# EAGLE board nixie (EAGLE 9.1.3)
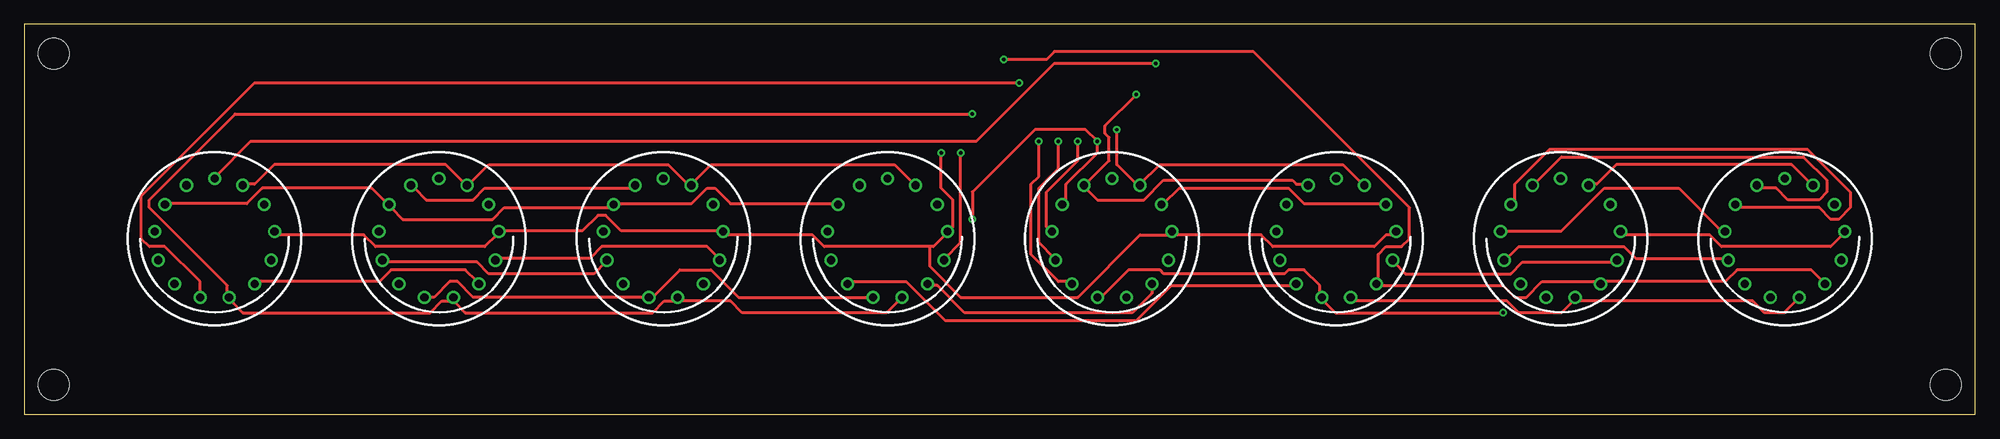
[diagram p0: board, top side]
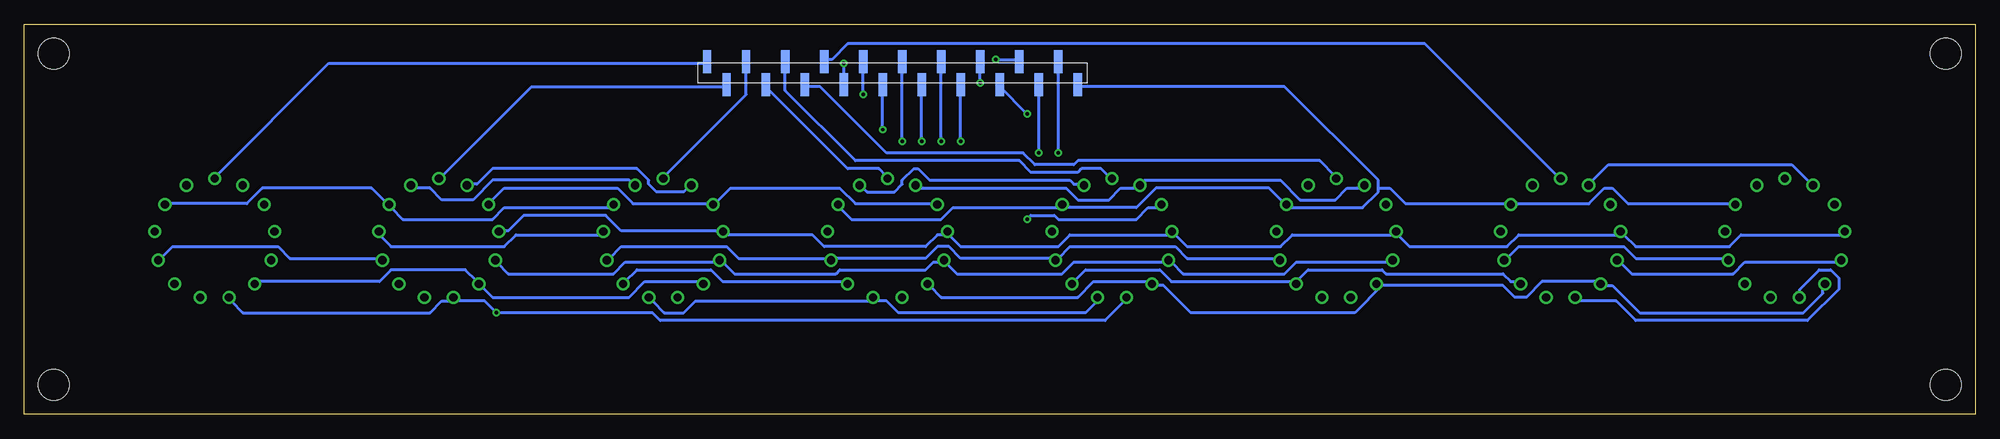
[diagram p1: board, bottom side, seen from below]

Size 200 x 40 mm. Coordinates in mm from the lower left corner, seen from the top.
Outline: 0,0 200,0 200,40 0,40 0,0
Copper layers (1*16): Top 0.035mm / dielectric 1.5mm / Bottom 0.035mm
Design rules "default": minimum track width 6mil, minimum drill 0.35mm, track to track 6mil, track to pad 6mil, pad to pad 6mil, via to via 6mil, smd to smd 6mil, copper to edge 40mil, drill to drill 6mil, minimum pad ring 10mil, minimum via ring 8mil, stop-mask expansion 4mil, vias tented up to drill 0mil, thermal gap 10mil
Net classes: 0 default: width 0.3 mm, clearance 0.5 mm
Holes 3.2 mm at 3,37 3,3 197,3 197,37

## Footprints (pad centres in the part's own frame; a part is rotated, then mirrored left to right if it is on the bottom)
PSM-210223 = smd 0.85 x 2.35: 1 0,1.175; 2 2,-1.175; 3 4,1.175; 4 6,-1.175; 5 8,1.175; 6 10,-1.175; 7 12,1.175; 8 14,-1.175; 9 16,1.175; 10 18,-1.175; 11 20,1.175; 12 22,-1.175; 13 24,1.175; 14 26,-1.175; 15 28,1.175; 16 30,-1.175; 17 32,1.175; 18 34,-1.175; 19 36,1.175; 20 38,-1.175
IN-14 = drill 0.84: 0 5.094,-3.516; 1 -5.094,-3.516; 2 -6.145,-0.746; 3 -5.788,2.195; 4 -4.105,4.633; 5 -1.481,6.01; 6 1.481,6.01; 7 4.105,4.633; 8 5.788,2.195; 9 6.145,-0.746; A 0,-6.19; LHDP 2.877,-5.481; RHDP -2.877,-5.481

## Placement (x,y rotation side)
J4  PSM-210223  [PSM-210223]  92,35 180 bottom
N1  IN-14  [IN-14]  19.5,18 180 top
N2  IN-14  [IN-14]  42.5,18 180 top
N3  IN-14  [IN-14]  65.5,18 180 top
N4  IN-14  [IN-14]  88.5,18 180 top
N5  IN-14  [IN-14]  111.5,18 180 top
N6  IN-14  [IN-14]  134.5,18 180 top
N7  IN-14  [IN-14]  157.5,18 180 top
N8  IN-14  [IN-14]  180.5,18 180 top

## Library data of the parts
J4 N1-N8 = taki-library

## Nets
N$88: J4.1 N1.1 N2.1 N3.1 N4.1 N5.1 N6.1 N7.1 N8.1
N$89: J4.3 N1.3 N2.3 N3.3 N4.3 N5.3 N6.3 N7.3 N8.3
N$91: J4.4 N1.4 N2.4 N3.4 N4.4 N5.4 N6.4 N7.4 N8.4
N$92: J4.5 N1.5 N2.5 N3.5 N4.5 N5.5 N6.5 N7.5 N8.5
N$93: J4.7 N1.7 N2.7 N3.7 N4.7 N5.7 N6.7 N7.7 N8.7
N$95: J4.8 N1.8 N2.8 N3.8 N4.8 N5.8 N6.8 N7.8 N8.8
N$96: J4.9 N1.9 N2.9 N3.9 N4.9 N5.9 N6.9 N7.9 N8.9
N$97: J4.12 N1.LHDP N2.LHDP N3.LHDP N4.LHDP N5.LHDP N6.LHDP N7.LHDP N8.LHDP
N$98: J4.11 N1.RHDP N2.RHDP N3.RHDP N4.RHDP N5.RHDP N6.RHDP N7.RHDP N8.RHDP
N$99: J4.2 N1.2 N2.2 N3.2 N4.2 N5.2 N6.2 N7.2 N8.2
N$100: J4.6 N1.6 N2.6 N3.6 N4.6 N5.6 N6.6 N7.6 N8.6
N$101: J4.10 N1.0 N2.0 N3.0 N4.0 N5.0 N6.0 N7.0 N8.0
N$102: J4.13 N1.A
N$103: J4.14 N2.A
N$104: J4.15 N3.A
N$105: J4.16 N4.A
N$106: J4.17 N5.A
N$107: J4.18 N6.A
N$108: J4.19 N7.A
N$109: J4.20 N8.A

## Tracks (layer width: path | path; a pad name or v marks a point on that pad's centre or on a via)
N$88
  Top 0.3: N6.1 139.2,21.6 131.2,21.6 129.6,23.2 118.4,23.2 116.8,21.6 N5.1
  Bottom 0.3: N6.1 139.6,21.2 150.8,21.2 152,20 161.2,20 162.4,21.2 N7.1 162.8,21.6 164.4,23.2 175.6,23.2 177.2,21.6 185.2,21.6 N8.1 | N5.1 116.4,21.2 115.2,20 106,20 104.8,21.2 93.6,21.2 N4.1 93.2,21.2 86,21.2 84,23.2 72.4,23.2 70.8,21.6 N3.1 70.4,21.2 62.8,21.2 61.2,22.8 61.2,23.2 | N1.1 24.8,21.6 35.6,21.6 37.2,23.2 38,23.2 39.6,21.6 47.2,21.6 N2.1 47.6,21.6 58.4,21.6 60,23.2 61.2,23.2 | 61.2,23.2 61.2,24 70.8,33.6 92,33.6 J4.1
N$89  (via drill 0.35)
  Top 0.3: v96,26.8 96,17.6 94.4,16 N4.3 | N2.3 48.4,16 58,16 59.2,17.2 70,17.2 71.2,16 N3.3 | N7.3 163.2,15.6 153.6,15.6 152.4,14.4 141.6,14.4 140.4,15.6 N6.3
  Bottom 0.3: N7.3 163.6,16 172.8,16 174,17.2 184.8,17.2 186,16 N8.3 | N6.3 140,16 138.8,17.2 128,17.2 126.8,16 117.6,16 N5.3 117.2,16 107.6,16 106.4,17.2 105.2,17.2 104,16 94.4,16 N4.3 94,16 92.8,17.2 82,17.2 80.8,16 71.6,16 N3.3 | N1.3 25.6,16 34.8,16 36,17.2 46.8,17.2 48,16 N2.3 | v96,26.8 96,33.6 J4.3
N$91  (via drill 0.35)
  Top 0.3: N1.4 24,13.6 36.4,13.6 37.6,14.8 45.2,14.8 46.4,13.6 N2.4 | N8.4 184.4,13.6 183.2,14.8 175.6,14.8 174.4,13.6 162,13.6 N7.4 161.6,13.6 155.6,13.6 154,12 152.8,12 151.6,13.2 138.8,13.2 N6.4 138.8,13.6 138.8,16.4 139.6,17.2 141.2,17.2 142,18 142,21.2 126,37.2 105.6,37.2 104.8,36.4 v100.4,36.4 | N4.4 92.8,13.2 93.6,13.2 96.4,10.4 113.6,10.4 115.6,12.4 115.6,13.2 N5.4
  Bottom 0.3: N4.4 92.4,13.6 91.2,14.8 83.6,14.8 82.4,13.6 70,13.6 N3.4 69.6,13.6 68.4,14.8 60.8,14.8 60.4,14.4 48.4,14.4 47.6,13.6 46.8,13.6 N2.4 | v100.4,36.4 98,36.4 J4.4 | N5.4 116,13.6 128.4,13.6 129.6,14.8 137.2,14.8 138.4,13.6 N6.4
N$92  (via drill 0.35)
  Top 0.3: N8.5 181.6,11.6 180.4,10.4 178.4,10.4 177.2,11.6 159.2,11.6 N7.5 158.8,11.6 157.6,10.4 153.2,10.4 152,11.6 136,11.6 N6.5 | N4.5 89.6,11.6 88.4,10.4 73.6,10.4 72.4,11.6 67.2,11.6 N3.5 66.8,11.6 65.6,11.6 64.4,10.4 45.2,10.4 44,11.6 N2.5 43.6,11.6 42.8,11.6 41.6,10.4 22.4,10.4 21.2,11.6 N1.5 20.8,12 20.8,13.2 12.8,21.2 12.8,22 21.6,30.8 v97.2,30.8
  Bottom 0.3: N6.5 135.6,11.6 134.4,10.4 132.4,10.4 131.2,11.6 113.2,11.6 N5.5 112.8,11.6 111.6,11.6 110.4,10.4 91.2,10.4 90,11.6 N4.5 | v97.2,30.8 100,33.6 J4.5
N$93  (via drill 0.35)
  Top 0.3: v104,28 104,24.4 103.2,23.6 103.2,16.4 106,13.6 107.2,13.6 N5.7 | N6.7 130,13.2 117.6,13.2 114,9.6 94.4,9.6 90.4,13.6 84.4,13.6 N4.7
  Bottom 0.3: N6.7 130.4,13.6 136.4,13.6 138,12 152,12 153.2,13.2 N7.7 153.6,13.6 154.8,14.8 162.4,14.8 163.6,13.6 176,13.6 N8.7 | v104,28 104,33.6 J4.7 | N5.7 107.2,13.2 106,12 92,12 90.4,13.6 84.4,13.6 N4.7 84,13.2 83.2,13.2 80.4,10.4 63.6,10.4 60.8,13.2 | N1.7 15.6,13.2 15.6,12.4 17.6,10.4 34.4,10.4 37.2,13.2 38,13.2 N2.7 38.4,13.6 44.4,13.6 46,12 47.2,12 48.4,13.2 60.8,13.2 | 60.8,13.2 61.2,13.2 N3.7 60.8,13.2
N$95  (via drill 0.35)
  Top 0.3: N2.8 36.8,15.6 46.4,15.6 47.6,14.4 58.4,14.4 59.6,15.6 N3.8 | v106,28 106,25.2 104,23.2 104,17.6 105.6,16 N5.8 | N8.8 174.4,16 165.2,16 164,17.2 153.2,17.2 152,16 N7.8
  Bottom 0.3: N1.8 14,15.6 23.6,15.6 24.8,14.4 35.2,14.4 36.4,15.6 N2.8 | N3.8 60,15.6 69.6,15.6 70.8,14.4 81.2,14.4 82.4,15.6 N4.8 82.8,15.6 92.4,15.6 93.6,14.4 104.4,14.4 105.6,15.6 N5.8 106,15.6 106.8,15.6 107.6,14.8 116.4,14.8 116.8,14.4 127.2,14.4 128.4,15.6 N6.8 128.8,15.6 138.4,15.6 139.6,14.4 150.4,14.4 151.6,15.6 N7.8 | v106,28 106,36 J4.8
N$96  (via drill 0.35)
  Top 0.3: v108,28 108,26 104.8,22.8 104.8,19.2 105.2,18.8 N5.9 | N8.9 174,18.8 169.6,23.2 162,23.2 157.6,18.8 151.6,18.8 N7.9
  Bottom 0.3: N1.9 13.6,18.4 24,18.4 25.2,17.2 34.8,17.2 36,18.4 N2.9 36.4,18.4 46.8,18.4 48,17.2 58,17.2 59.2,18.4 N3.9 59.6,18.4 70,18.4 71.2,17.2 80.8,17.2 82,18.4 N4.9 82.4,18.4 92.8,18.4 94,17.2 104,17.2 105.2,18.4 N5.9 105.6,18.4 106.4,18.4 107.6,17.2 118,17.2 119.2,18.4 128,18.4 N6.9 128.4,18.8 138.8,18.8 140.4,20.4 148.8,20.4 150.4,18.8 151.2,18.8 N7.9 | v108,28 108,33.6 J4.9
N$97  (via drill 0.35)
  Top 0.3: N3.LHDP 62.4,23.2 47.2,23.2 46,22 41.2,22 40,23.2 N2.LHDP | v114,32.8 110.8,29.6 110.8,28.8 111.2,28.4 111.2,26 108.8,23.6 N5.LHDP 108.8,23.2 110,22 114.8,22 116.8,24 130,24 130.4,23.6 131.6,23.6 N6.LHDP | N8.LHDP 178,23.2 179.6,23.2 180.8,22 184,22 184.8,22.8 184.8,24 182.4,26.4 157.6,26.4 154.8,23.6 N7.LHDP
  Bottom 0.3: N1.LHDP 16.8,23.6 18.8,25.6 37.6,25.6 39.6,23.6 N2.LHDP | v114,32.8 114,36 J4.12 | N5.LHDP 108.4,23.2 93.2,23.2 92,22 88.8,22 87.6,23.2 86,23.2 N4.LHDP 85.6,23.6 85.2,24 71.2,24 69.2,22 65.6,22 64.4,23.2 62.8,23.2 N3.LHDP | N7.LHDP 154.4,23.6 153.6,23.6 152,25.2 137.2,25.2 136,24 136,23.6 135.2,22.8 132.4,22.8 132,23.2 N6.LHDP
N$98  (via drill 0.35)
  Top 0.3: N1.RHDP 22.4,23.6 23.6,23.6 25.6,25.6 43.2,25.6 45.2,23.6 N2.RHDP 45.6,23.6 47.6,25.6 66,25.6 68,23.6 N3.RHDP 68.4,23.6 70.4,25.6 89.2,25.6 91.2,23.6 N4.RHDP | N7.RHDP 160.4,23.6 161.2,23.6 163.2,25.6 181.2,25.6 183.2,23.6 N8.RHDP | v112,29.2 112,25.6 114,23.6 N5.RHDP 114.4,23.6 116.4,25.6 135.2,25.6 137.2,23.6 N6.RHDP
  Bottom 0.3: v112,29.2 112,33.6 J4.11 | N7.RHDP 160,23.2 158.4,23.2 157.2,22 154,22 152,24 138,24 137.6,23.6 N6.RHDP | N4.RHDP 91.6,23.6 92.4,23.6 92.8,24 107.2,24 108.4,25.2 108.8,25.2 110,24 110,23.6 110.8,22.8 113.6,22.8 114,23.2 N5.RHDP
N$99  (via drill 0.35)
  Top 0.3: N6.2 140.4,18.4 139.6,18.4 138.4,17.2 128,17.2 126.8,18.4 118,18.4 N5.2 117.6,18.4 114.4,18.4 108,12 96,12 92.8,15.2 92.8,17.2 | N7.2 164,18.4 172.8,18.4 174,17.2 185.2,17.2 186.4,18.4 N8.2 | N1.2 26,18.4 34.8,18.4 36,17.2 47.2,17.2 48.4,18.4 N2.2 48.8,18.8 57.2,18.8 58.8,20.4 59.6,20.4 61.2,18.8 71.6,18.8 N3.2 72,18.4 80.8,18.4 82,17.2 92.8,17.2 | v94,26.8 94,23.2 95.2,22 95.2,19.2 94.8,18.8 N4.2 94.4,18.4 93.2,17.2 92.8,17.2
  Bottom 0.3: N6.2 140.8,18.4 149.6,18.4 150.8,17.2 162.4,17.2 163.6,18.4 N7.2 | v94,26.8 94,36 J4.2
N$100  (via drill 0.35)
  Top 0.3: N5.6 110.4,12 113.2,14.8 116.4,14.8 116.8,14.4 129.2,14.4 129.6,14.8 131.2,14.8 132.8,13.2 132.8,12 N6.6 133.2,11.6 134.4,10.4 v151.6,10.4 | N2.6 41.2,12 42,12 43.6,13.6 44.4,13.6 46,12 64,12 N3.6 64.4,12 67.2,14.8 70.4,14.8 73.2,12 86.8,12 N4.6 | v102,34 23.6,34 12,22.4 12,18 12.8,17.2 14.4,17.2 18,13.6 18,12 N1.6
  Bottom 0.3: N8.6 178.8,11.6 177.6,10.4 158.4,10.4 157.2,11.6 156.4,11.6 N7.6 156,11.6 152.8,11.6 v151.6,10.4 135.6,10.4 134.8,9.6 89.2,9.6 87.2,11.6 N4.6 | v102,34 102,36 J4.6 | N2.6 40.8,11.6 36.8,11.6 34.8,9.6 17.2,9.6 14,12.8 14,14 14.8,14.8 16,14.8 18,12.8 18,12 N1.6
N$101  (via drill 0.35)
  Top 0.3: N1.0 14.8,21.6 22.8,21.6 24.4,23.2 35.6,23.2 37.2,21.6 N2.0 37.6,21.2 38.8,20 48,20 49.2,21.2 60.4,21.2 N3.0 60.8,21.6 68.4,21.6 70,23.2 70.8,23.2 72.4,21.6 83.2,21.6 N4.0 | N5.0 106.8,21.6 106.8,23.6 110,26.8 v110,28 108.8,29.2 103.6,29.2 97.2,22.8 v97.2,20 | N8.0 175.6,21.2 184,21.2 185.2,20 186,20 187.2,21.2 187.2,22.8 182.8,27.2 156.4,27.2 152.8,23.6 152.8,21.6 N7.0
  Bottom 0.3: v110,28 110,36 J4.10 | N7.0 152.4,21.6 150.8,23.2 139.2,23.2 137.6,21.6 129.6,21.6 N6.0 129.2,21.6 127.6,23.2 116.4,23.2 114.8,21.6 106.8,21.6 N5.0 | v97.2,20 96.8,20.4 94.4,20.4 94,20 86,20 84.8,21.2 83.6,21.2 N4.0
N$102  (via drill 0.35)
  Top 0.3: v116,36 105.6,36 97.6,28 23.2,28 19.6,24.4 N1.A
  Bottom 0.3: v116,36 116,34 J4.13
N$103
  Bottom 0.3: J4.14 118,36.4 117.2,36.4 115.6,38 56.4,38 42.8,24.4 N2.A
N$104
  Bottom 0.3: J4.15 120,33.6 118.4,33.6 111.6,26.8 97.6,26.8 96.4,25.6 92.4,25.6 92,26 67.2,26 65.6,24.4 N3.A
N$105
  Bottom 0.3: J4.16 122,36 122,33.2 114.8,26 98,26 96.8,24.8 92,24.8 91.6,25.2 89.6,25.2 88.8,24.4 N4.A
N$106
  Bottom 0.3: J4.17 124,33.6 115.6,25.2 112.4,25.2 111.6,24.4 N5.A
N$107
  Bottom 0.3: J4.18 126,36 126,32.8 134.4,24.4 N6.A
N$108
  Bottom 0.3: J4.19 128,33.6 148,33.6 157.2,24.4 N7.A
N$109
  Bottom 0.3: J4.20 130,36 168.8,36 180.4,24.4 N8.A